# Altium PCB UV_LED_CARD.PcbDoc
Units mil, origin at the board's own origin, x right, y up, seen from the top; angles counter-clockwise.
Board outline 5905.51 x 5905.51 mil, 2 copper layers (Top Layer, Bottom Layer); 41 components, 27 nets, 152 pads, 0 vias.
Unrouted connection lines stored in the file: 1.
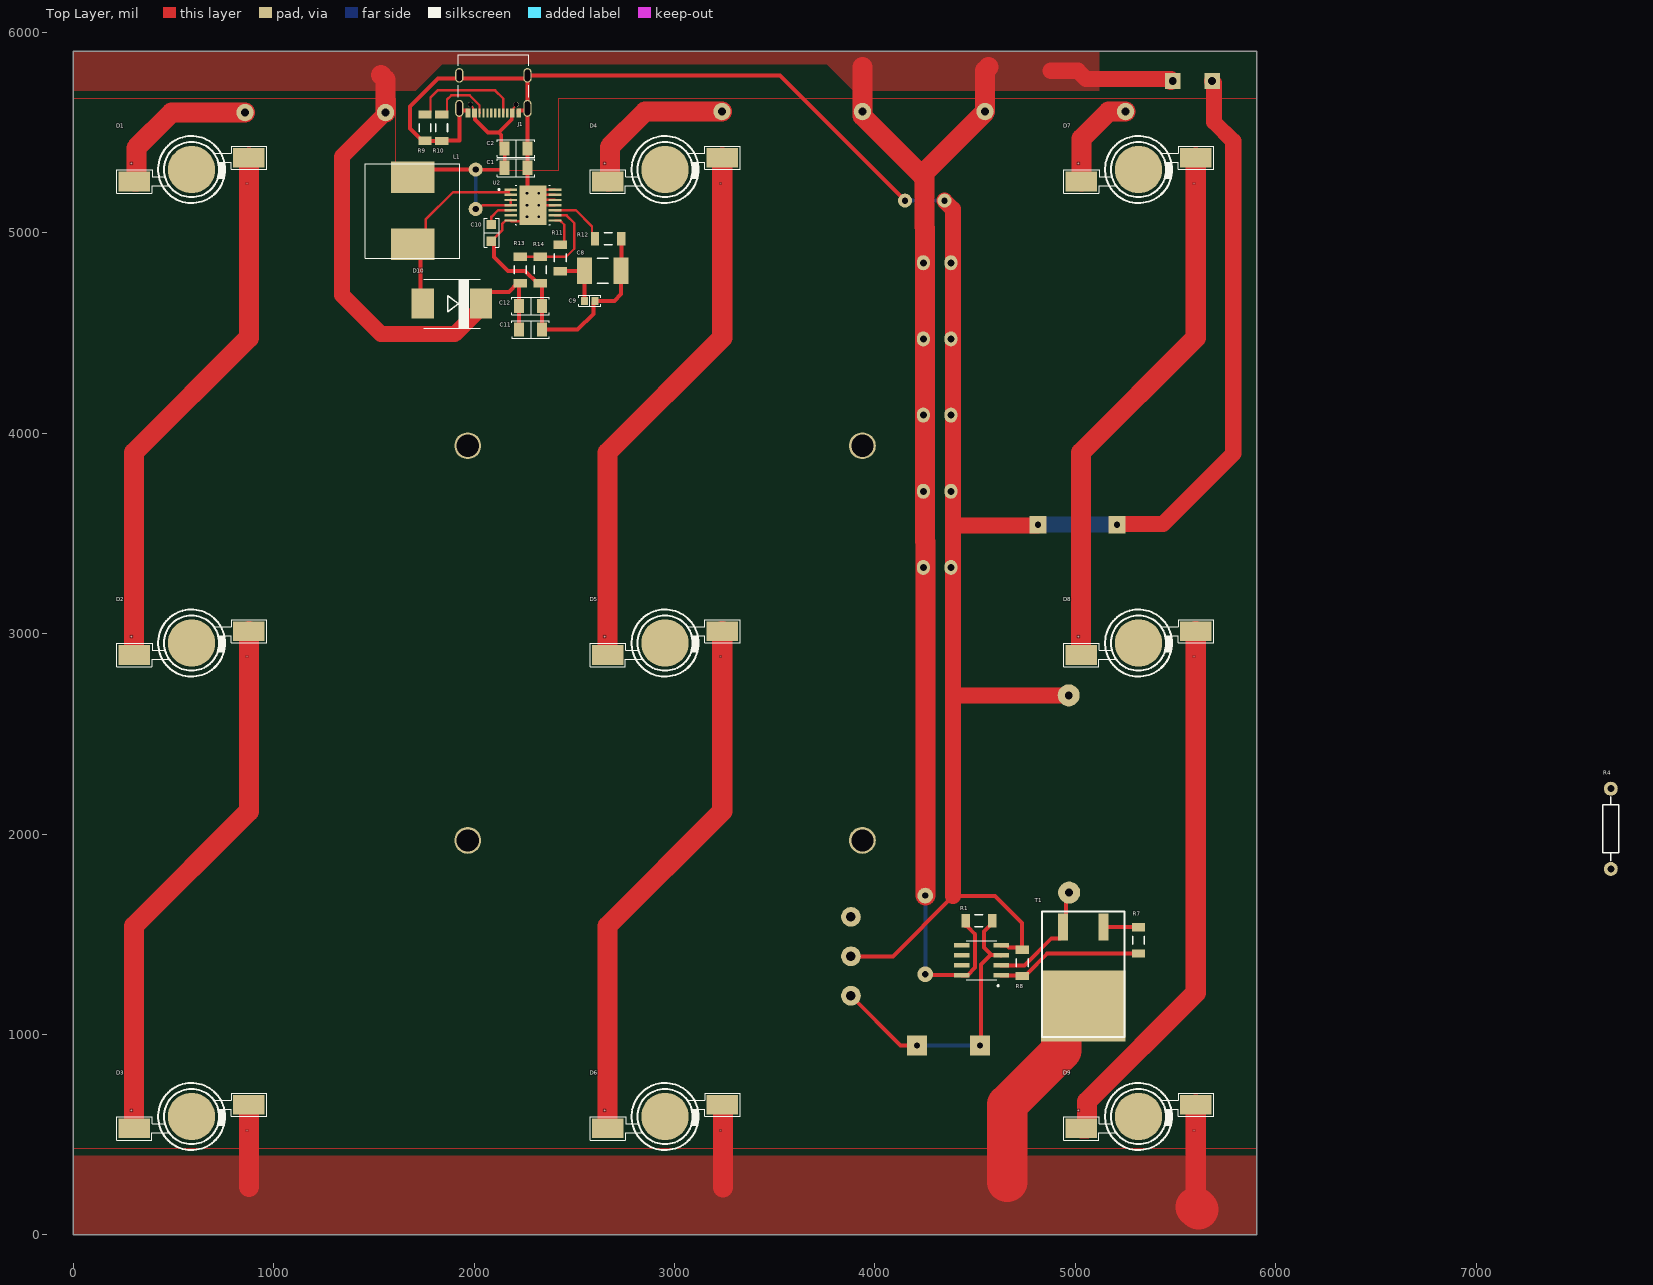
[diagram p0: Top Layer view]
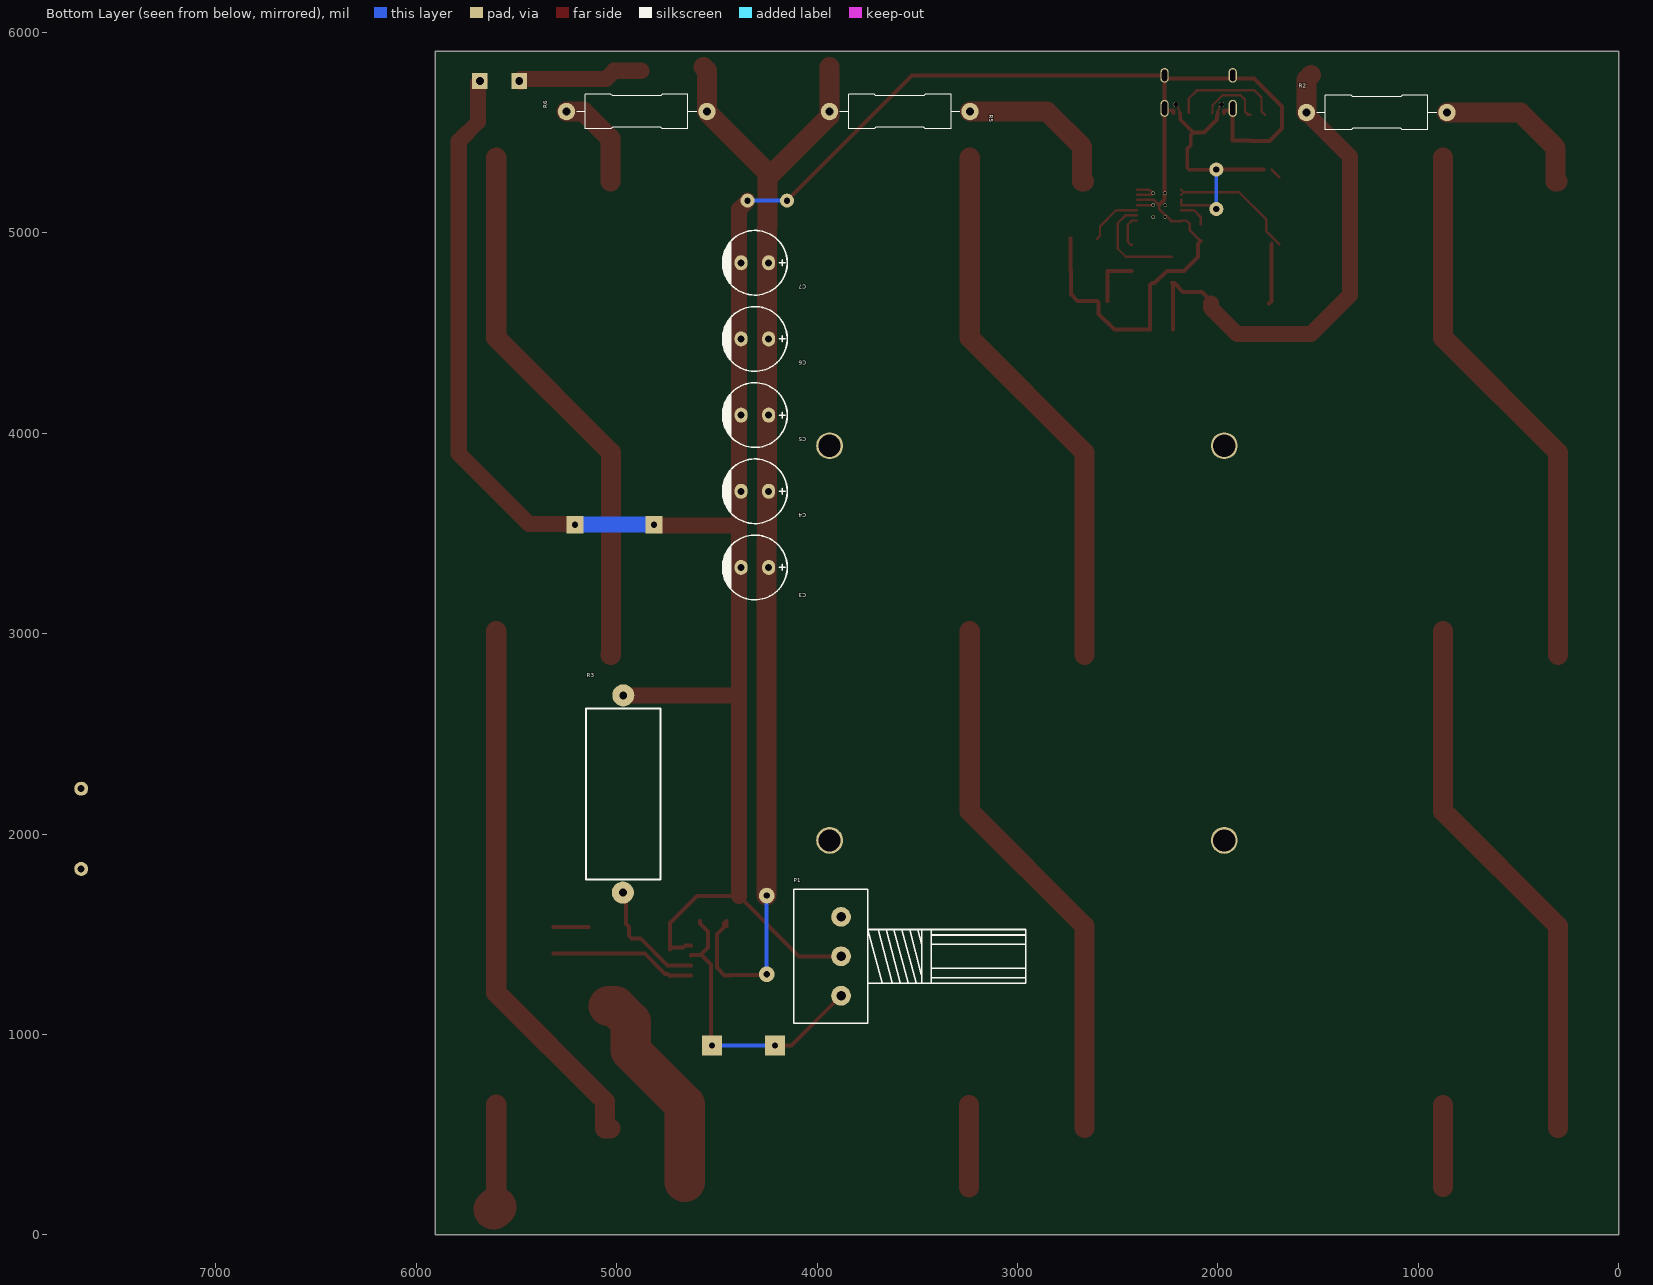
[diagram p1: Bottom Layer view, seen from below]
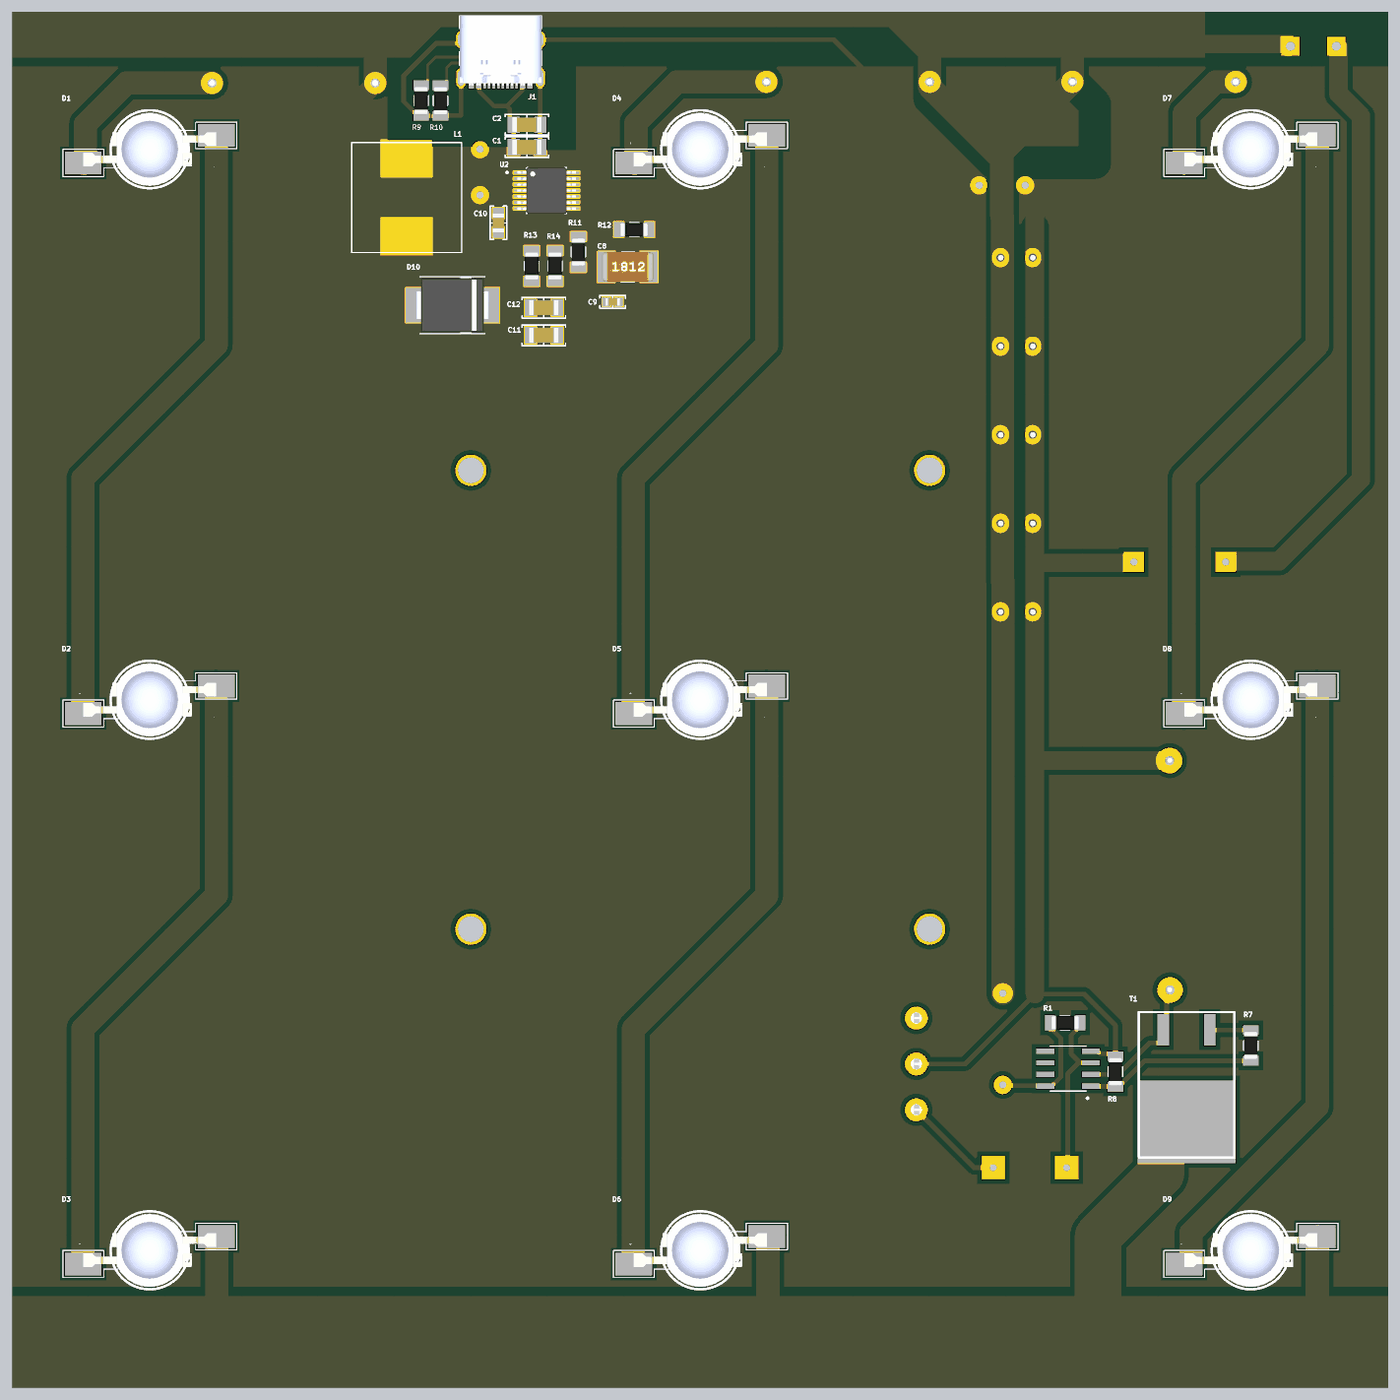
[diagram p2: 3D render of the assembled board from above, using the file's embedded part models]
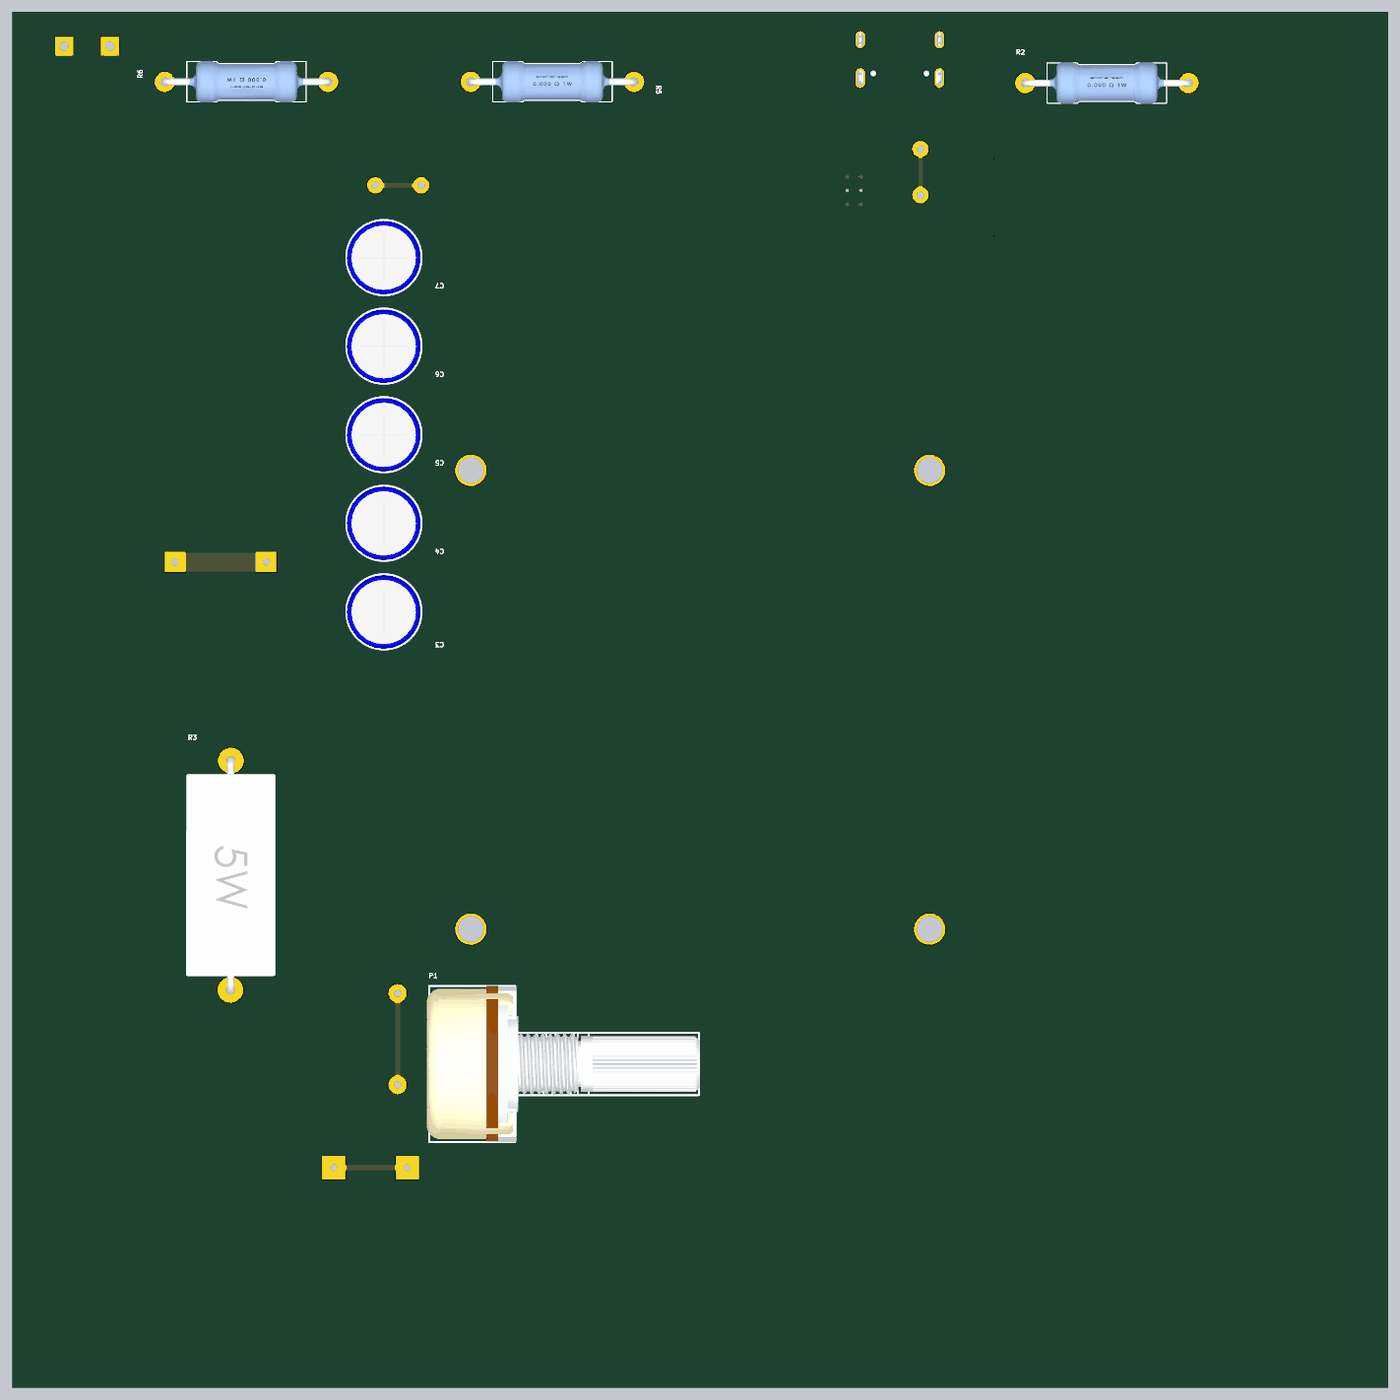
[diagram p3: 3D render of the assembled board from below, using the file's embedded part models]

## Layer stack, top to bottom
Top Solder: solder mask 0.4, Solder Resist, Dk 3.5
Top Layer: signal copper 1.4
Dielectric 1: dielectric 12.6, FR-4, Dk 4.8
Bottom Layer: signal copper 1.4
Bottom Solder: solder mask 0.4, Solder Resist, Dk 3.5

## Board outline
0,0 5905.51,0 5905.51,5905.51 0,5905.51

## Design rules (kind name [scope] priority, off if disabled: settings)
Clearance [All] p1: gap=10 ignorepadtopadclearanceinfootprint=FALSE except(2: Arc-SMDPad Track-SMDPad SMDPad-SMDPad SMDPad-THPad SMDPad-Via SMDPad-Fill SMDPad-Region SMDPad-Text SMDPad-Hole; 20: Arc-Poly Track-Poly SMDPad-Poly THPad-Poly Via-Poly Fill-Poly Poly-Poly Poly-Region Poly-Text Poly-Hole)
PolygonConnect PolygonConnect_1 [(InNet('Thermal Layer'))] p1: connectstyle=Direct reliefconductorwidth=50 reliefentries=4 polygonreliefangle="90 Angle" airgapwidth=10
PolygonConnect [All] p2: connectstyle=Relief reliefconductorwidth=10 reliefentries=4 polygonreliefangle="90 Angle" airgapwidth=10
RoomDefinition Power [InComponentClass('Room Definition2')] p1: confinementstyle=ConfineIn formatcopy=TRUE lockcomponents=FALSE outline 1444.43,4849.09 1444.43,5368.09 1705.63,5368.09 1705.63,5626.5 1788.65,5626.5 1788.65,5629.88 1884.65,5629.88 1884.65,5908.07 2307.8,5908.07 2307.8,5477.24 2315.67,5477.24 2315.67,5257.05 2455.87,5257.05 2455.87,5019.37 2771.34,5019.37 2771.34,4891.97 2788.74,4891.97 2788.74,4728.03 2644.65,4728.03 2644.65,4619.49 2388.03,4619.49 2388.03,4459.29 2175.12,4459.29 2175.12,4511.43 1674.98,4511.43 1674.98,4849.09
RoutingVias [All] p1: holewidth=28 width=50 viastyle="Through Hole" minholewidth=28 minwidth=50 maxholewidth=28 maxwidth=50
SolderMaskExpansion [All] p1: expansion=4 istentingtop=FALSE
SupplyNets "Schematic Supply Nets_8" [InNet('+12V')] p1: voltage=0.000
SupplyNets "Schematic Supply Nets_7" [InNet('+5V')] p2: voltage=0.000
SupplyNets "Schematic Supply Nets_1" [InNet('GND')] p3: voltage=0.000
Width [All] p1: maxlimit=200 minlimit=10 preferedwidth=60 minimp=50.000000 maximp=50.000000 favimp=50.000000
30 further rules are at their usual default settings.

## Classes and differential pairs
component class "Room Definition2": C1 C2 C8 C9 C10 C11 C12 D10 J1 L1 R9 R10 R11 R12 R13 R14 U2
component class "Room Definition1": C1 C2 C8 C9 C10 C11 C12 D10 L1 R11 R12 R13 R14 U2

## Components (designator, comment, footprint, x,y, rotation, side; value= is the part's Value field where it differs from the comment)
C1 "10uF" "CAP 1206/3216" 2209.21,5324.28 r0 top
C2 "100nF" "CAP 1206/3216" 2209.21,5420 r0 top
C3 "470uF" "cap 03" 4310,3330 r180 bottom
C4 "470uF" "cap 03" 4310,3710 r180 bottom
C5 "470uF" "cap 03" 4310,4090 r180 bottom
C6 "470uF" "cap 03" 4310,4470 r180 bottom
C7 "470uF" "cap 03" 4310,4850 r180 bottom
C8 "120nF" 1812_C 2641.77,4810 r0 top
C9 "3.9nF" "CAP 0603/1608" 2576.57,4660 r0 top
C10 "27nF" "CAP 0805/2012" 2086.61,4998.52 r270 top
C11 "47uF" "CAP 1206/3216" 2281.57,4516.54 r0 top
C12 "1uF" "CAP 1206/3216" 2281.57,4634.65 r0 top
D1 "3'Watt" "POWER LED 1WATT" 590.55,5314.96 r0 top
D2 "3'Watt" "POWER LED 1WATT" 590.55,2952.76 r0 top
D3 "3'Watt" "POWER LED 1WATT" 590.55,590.55 r0 top
D4 "3'Watt" "POWER LED 1WATT" 2952.76,5314.96 r0 top
D5 "3'Watt" "POWER LED 1WATT" 2952.76,2952.76 r0 top
D6 "3'Watt" "POWER LED 1WATT" 2952.76,590.55 r0 top
D7 "3'Watt" "POWER LED 1WATT" 5314.96,5314.96 r0 top
D8 "3'Watt" "POWER LED 1WATT" 5314.96,2952.76 r0 top
D9 "3'Watt" "POWER LED 1WATT" 5314.96,590.55 r0 top
D10 "B560C-13-F" SMC 1889.76,4645.67 r180 top
J1 "10155435-00011LF" AMPHENOL_10155435-00011LF 2096.22,5784.88 r180 top
L1 "Inductor" PCBComponent_1 1692.91,5021.59 r0 top
P1 "10k" POT_WH148 3880,1390 r90 bottom
R1 "240k" "RES 1206 (3216X08L)" 4569.8,1566.93 r180 top
R2 "1R" "Axial 1W  7_0mm" 1208,5599 r180 bottom
R3 "27b" "Res 5W" 4960.63,2204.72 r0 bottom
R4 "0" Res-(1/4) 7670,2020 r90 top
R5 "1R" "Axial 1W  7_0mm" 3587,5604 r180 bottom
R6 "1R" "Axial 1W  7_0mm" 4900,5604 r0 bottom
R7 "100R" "RES 1206 (3216X08L)" 5314.96,1520.59 r270 top
R8 "100K" "RES 1206 (3216X08L)" 4734.33,1306.02 r90 top
R9 "5.1k" "RES 1206 (3216X08L)" 1755,5575.16 r270 top
R10 "5.1k" "RES 1206 (3216X08L)" 1838.02,5472.24 r90 top
R11 "768R" "RES 1206 (3216X08L)" 2430,4822.95 r90 top
R12 "60.4k" "RES 1206 (3216X08L)" 2720,4970 r180 top
R13 "86.6K" "RES 1206 (3216X08L)" 2230,4762.95 r90 top
R14 "10K" "RES 1206 (3216X08L)" 2329.69,4865.16 r270 top
T1 "D2PAK NMOS" "D2PAK NMOS" 5249.37,1321.73 r180 top
U2 "TPS55340PWPR" IC_TPS55340PWPR 2293.31,5137.8 r0 top

## Footprints (in the part's own frame and the unit in brackets; to place one, negate y for a bottom-side part, rotate by r counter-clockwise, add the part's x,y. Pads: shape width x height; smd on the part's side, far side on the other; paste and mask are expansions set on the pad)
1812_C [mm] "Surface mount capacitor 1812"
  rect 1.9x3.4 smd: 1(-2.331,0) 2(2.331,0)
  silkscreen extent -0.7,-1.6 0.7,1.6, body extent -2.81,-1.6 2.81,1.6, height 2.54
AMPHENOL_10155435-00011LF [mm]
  rect 0.6x1.15 smd: A1_B12(-3.2,4.745) A4_B9(-2.4,4.745) B1_A12(3.2,4.745) B4_A9(2.4,4.745)
  rect 0.3x1.15 smd: A5(-1.25,4.745) A6(-0.25,4.745) A7(0.25,4.745) A8(1.25,4.745) B5(1.75,4.745) B6(0.75,4.745) B7(-0.75,4.745) B8(-1.75,4.745)
  oval 1.05x2.15 hole 0.65 slot 1.75 at 90 deg: SH1(-4.32,4.18) SH2(4.32,4.18)
  oval 1.05x1.85 hole 0.65 slot 1.45 at 90 deg: SH3(-4.32,0) SH4(4.32,0)
  round 0.65 hole 0.65 unplated: ""(-2.89,3.68) ""(2.89,3.68)
  silkscreen extent -4.47,-2.6 4.47,2.79, body extent -4.47,-2.6 4.47,5, height 3.26
"Axial 1W  7_0mm" [mm] "Designer Abbas Basereh"
  round 2.2 hole 1: 1(8.9,0) 2(-8.9,0)
  silkscreen extent -7.6,-2.2 7.6,2.2, body extent -9.26,-2.24 9.27,2.24, height 5.22
"cap 03" [mil] "diameter: 8'mm"
  oval 65x75 hole 35: 1(68.9,0) 2(-68.9,0)
  silkscreen extent -161,-161 161,161, body extent -159,-159 157,158, height 473
"CAP 0603/1608" [mm] "Chip Capacitor, 2-Leads, Body 1.60x0.80mm, IPC Medium Density"
  rect 0.9x1 smd: 1(-0.675,0) 2(0.675,0)
  silkscreen extent -1.4,-0.7 1.4,0.7, body extent -0.8,-0.41 0.8,0.41, height 0.82
"CAP 0805/2012" [mm] "Chip Capacitor, 2-Leads, Body 2.00x1.20mm, IPC Medium Density"
  rect 1.2x1.2 smd: 1(-1.075,0) 2(1.025,0)
  silkscreen extent -1.86,-0.9 1.82,0.9, body extent -1,-0.64 1,0.64, height 1.26
"CAP 1206/3216" [mm] "Chip Capacitor, 2-Leads, Body 3.25x1.60mm, IPC Medium Density"
  rect 1.3x1.8 smd: 1(-1.45,0) 2(1.45,0)
  silkscreen extent -2.37,-1.12 2.37,1.12, body extent -1.6,-0.81 1.6,0.81, height 1.62
"D2PAK NMOS" [mil]
  rect 49.49x135 smd: 0(110.26,-215) 2(310.24,-215)
  rect 420x355 smd: 1(210,180)
  silkscreen extent 5,-291 415,334
IC_TPS55340PWPR [mm]
  rect 1.6x0.3 smd paste-0.025: 1(-2.8,1.95) 2(-2.8,1.3) 3(-2.8,0.65) 4(-2.8,0) 5(-2.8,-0.65) 6(-2.8,-1.3) 7(-2.8,-1.95) 8(2.8,-1.95) 9(2.8,-1.3) 10(2.8,-0.65) 11(2.8,0) 12(2.8,0.65) 13(2.8,1.3) 14(2.8,1.95)
  rect 3.4x5 smd paste-3 mask+0: 15(0,0)
  round 0.43 hole 0.33 mask+0: 16(-0.75,1.5) 17(0.75,1.5) 18(-0.75,0) 19(0.75,0) 20(-0.75,-1.5) 21(0.75,-1.5)
  silkscreen extent -4.4,-2.5 2.2,2.5, body extent -3.2,-2.5 3.2,2.5, height 1.2
PCBComponent_1 [mil]
  rect 217x157 / inner round 0 / far side round 0 all layers, no hole: 1(0,254) 2(0,-80)
  silkscreen extent -236,-150 236,322
POT_WH148 [mm] "Chip Variable Resistor, 3-Leads, Body 5x5x5mm"
  round 2.5 hole 1.2: 1(-5,0) 2(0,0) 3(5,0)
  silkscreen extent -8.5,-23.4 8.5,6, body extent -8.5,-23.55 8.5,6.25, height 21.5
"POWER LED 1WATT" [mm] "DESIGNER : ABBAS BASEREH"
  round 6 smd: 0(0,0)
  rect 4x2.5 smd: 1(-7.25,-1.5) 2(7.25,1.5)
  silkscreen extent -9.46,-4.25 9.51,4.25, body extent -7.25,-4 7.25,4, height 5.55
"Res 5W" [mil]
  round 110 hole 39.37: 1(6,-487) 2(8,497)
  silkscreen extent -180,-422 193,432, body extent -180,-504 194,512, height 355
"RES 1206 (3216X08L)" [mm] "Chip Resistor, 2-Leads, Body 3.2x1.6mm, IPC High Density _ (0.125 W)"
  rect 1.05x1.7 smd: 1(-0.377,0) 2(2.973,0)
  silkscreen extent 0.8,-0.75 1.8,0.75, body extent -0.23,-0.76 2.82,0.76, height 0.6
Res-(1/4) [mil]
  round 70 hole 35: 1(-194,-1) 2(206,-1)
  silkscreen extent -154,-41 166,39, body extent -204,-48 216,47, height 94
SMC [mm]
  rect 2.8x3.8 smd: A(3.7,0) C(-3.7,0)
  silkscreen extent -3.56,-3.11 3.56,3.11, body extent -3.97,-2.95 3.97,2.95, height 2.5

## Part data
C1 C2 C11 C12: library part Cap_Multi_SMD, "Bipolar ceramic capacitor SMD", Package=Package?, Rating=16VDC, Type=Type?, Validation=Valid, Inflow=inflow?
C3 C4 C5 C6 C7: library part Cap_Electrolit, "Electrolit Capacitor", Package=Dip, Rating=25V, Type=Electrolit, Validation=Valid, Inflow=inflow?
C8: library part Cap_Multi_SMD, "Bipolar ceramic capacitor SMD", Package=Package?, Type=Type?, Validation=Valid, Inflow=inflow?
C9 C10: library part Cap_Multi_SMD, "Bipolar ceramic capacitor SMD", Package=Package?, Rating=50VDC, Type=Type?, Validation=Valid, Inflow=inflow?
D1 D2 D3 D4 D5 D6 D7 D8 D9: library part Semi_LED_Power, "POWER LED SMD", Package=Package?, Rating=Rating?, Type=Type?, Validation=NT, Inflow=UV
D10: "Diode Schottky 60 V 5A Surface Mount SMC", Package="SMC-2 Diodes", Check_prices=https://www.snapeda.com/parts/B560C-13-F/Diodes+Inc./view-part/?ref=eda, MF="Diodes Inc.", MP=B560C-13-F, SnapEDA_Link=https://www.snapeda.com/parts/B560C-13-F/Diodes+Inc./view-part/?ref=snap
J1: Package=None, Availability=Unavailable, MP=10155435-00011LF, Price=None
L1: Value?=6.8uH
P1: library part Res_Pot, "Potentiometer", Package="POT 1/8W", Rating="POT 1/8W", Type="POT 1/8W", Validation="POT 1/8W", Inflow="POT 1/8W"
R1: library part Res_SMD, "Resistor", Package=1206, Rating=1/4W, Type=%5, Validation=Valid, Inflow=inflow?
R2 R5 R6: library part Res_1b_THT_1, "Resistor", Package=Package?, Rating=Rating?, Type=1W, Validation=NT, Inflow="1R 1W"
R3: library part Res_27b_THT_5, "Resistor", Package="Dip 5W", Rating=Rating?, Type=5W, Validation=NT, Inflow="470mR 5W"
R4: library part Res_THT, "Resistor", Package=Dip, Rating=0.25W, Type=10%, Validation=Valid, Inflow=inflow?
R7 R8 R9 R10 R11 R12 R13 R14: library part Res_SMD, "Resistor", Package=1206, Rating=Rating?, Type=10%, Validation=Valid, Inflow=inflow?
T1: "for SQM70060EL or any D2PAK NMOS"
U2: "5-A, 40-V, wide VIN boost, flyback, & SEPIC converter", Package="HTSSOP-14 Texas Instruments", Check_prices=https://www.snapeda.com/parts/TPS55340PWPR/Texas+Instruments/view-part/?ref=eda, Digi-Key_Part_Number=296-39426-2-ND, MF="Texas Instruments", MP=TPS55340PWPR, Purchase-URL=https://pricing.snapeda.com/search/part/TPS55340PWPR/?ref=eda, SnapEDA_Link=https://www.snapeda.com/parts/TPS55340PWPR/Texas+Instruments/view-part/?ref=snap

## Free pads (board coordinates)
  rect 77.56x22.44 smd: 1(4628.94,1295.08) 2(4628.94,1345.08) 3(4628.94,1395.08) 4(4628.94,1445.08) 5(4434.06,1445.08) 6(4434.06,1395.08) 7(4434.06,1345.08) 8(4434.06,1295.08)
  rect 86.61x86.61 hole 31.5: 4(4813.51,3543.32) 4(5207.21,3543.32)
  rect 100x100 hole 30: 5(4525.04,944.88) 6(4210.08,944.88)
  round 133.86 hole 110.24: 7(1968.5,1968.5) 7(1968.5,3937.01) 7(3937.01,1968.5) 7(3937.01,3937.01)
  round 78.74 hole 31.5: 9(4251.1,1300.08) 9(4251.1,1692.91)
  round 70 hole 31.5: 10(2007.87,5118.11) 10(2007.87,5314.96) 10(4150,5160) 10(4346.85,5160)
  rect 78.74x78.74 hole 39.37: ""(5485.39,5756.94) ""(5682.24,5756.94)

## Nets (pads, with @x,y where several pads share a name; then routed paths per layer and width w, separated by ;. In a path a pad name is that pad's centre, name@x,y a point inside that pad or via, vN(x,y) a via of type N, cw(c..) or ccw(c..) an arc to the next point about the centre after c; other vN are vias at no path point)
+5V: C1.1 C2.1 J1. J1.A4_B9 J1.B4_A9 L1.1 pad.10@2007.87,5118.11 pad.10@2007.87,5314.96 U2.3 U2.4 | length 1439.3
  Top Layer w10: J1.@1982.44,5640 1982.44,5635.78 1994.92,5623.3 1994.92,5615.71 2001.73,5608.9 J1.B4_A9 ; J1.A4_B9 2190.71,5608.9 2197.52,5615.71 2197.52,5623.3 2210,5635.78 J1.@2210,5640
  Top Layer w12: L1.1 L1.1@1732.28,5314.96 ; pad.10@2007.87,5118.11 2023.57,5118.11 2043.25,5137.8 U2.4 U2.3
  Top Layer w18: J1.B4_A9 2001.73,5587.24 2004.54,5584.43 2004.54,5564.82 2069.36,5500 2123.08,5500 ; pad.10@2007.87,5314.96 2142.8,5314.96 C1.1 C2.1 2135.54,5436.59 2135.54,5487.54 2123.08,5500 ; J1.A4_B9 2187.9,5595.26 2187.9,5564.82 2123.08,5500
  Top Layer w20: L1.1@1771.65,5314.96 pad.10@2007.87,5314.96
  Bottom Layer w18: pad.10@2007.87,5118.11 pad.10@2007.87,5314.96
+12V: C3.1 C4.1 C5.1 C6.1 C7.1 C11.1 C12.1 D10.C pad.8 pad.9 pad.@5485.39,5756.94 R1.2 R2.2 R5.2 R6.2 R13.1 | length 9066.2
  Top Layer w20: D10.C 2035.43,4659.41 2080.55,4704.53 2173.62,4704.53 2217.2,4748.11 R13.1 2224.49,4742.6 C12.1 C11.1 ; pad.9@4251.1,1300.08 4254.88,1296.3 4432.83,1296.3 pad.8 4461.61,1295.08 4500,1333.46 4500,1500 4459.98,1540.02 4459.98,1559.7 R1.2 ; R1.2@4452.76,1540 R1.2 ; R1.2@4463.43,1543.46 4463.43,1556.26 R1.2
  Top Layer w80: R2.2 1558.39,5597.21 1340,5378.82 1340,4690 1536.02,4493.98 1903.43,4493.98 2035.43,4625.98 D10.C ; 4877,5808 5012,5808 5053.85,5766.15 5476.18,5766.15 pad.@5476.18,5752.8
  Top Layer w100: 1535.43,5787.4 1558.39,5764.44 R2.2 ; 3937.01,5826.77 3937.39,5826.39 3937.39,5582.61 4246.85,5273.15 4246.85,5027.29 4250,5024.14 4250,3460 ; 4232.8,5287.2 R6.2 4549.61,5809.45 4566.93,5826.77 ; pad.9@4251.1,1692.91 4251.1,3460
  Bottom Layer w20: pad.9@4251.1,1300.08 pad.9@4251.1,1692.91
COMP: R11.2 U2.8 | length 166.6
  Top Layer w12: U2.8 2428.95,5061.02 2449.95,5040.02 2449.95,5014.62 2450,5014.57 2450,4954.67 2435.33,4940 R11.2
FB: R13.2 R14.1 U2.9 | length 527.1
  Top Layer w12: R13.2 R14.1 2459.97,4880 2500,4920.03 2500,5048.08 2461.56,5086.52 2403.64,5086.52 U2.9
FREQ: R12.2 U2.10 | length 285.9
  Top Layer w12: U2.10 2507.8,5112.2 2588.28,5031.72 2588.28,4984.67 R12.2
GND: C1.2 C2.2 C3.2 C4.2 C5.2 C6.2 C7.2 C8.2 C9.2 C10.2 C11.2 C12.2 J1.A1_B12 J1.B1_A12 J1.SH1 J1.SH2 J1.SH3 J1.SH4 P1.2 pad.4 pad.10@4150,5160 pad.10@4346.85,5160 pad.@5682.24,5756.94 R3.1 R8.2 R9.2 R10.1 R12.1 R14.2 U2.7 U2.11 U2.12 U2.13 U2.14 U2.15 U2.16 U2.17 U2.18 U2.19 U2.20 U2.21 | length 15155.4
  Top Layer w12: C10.2 2140,5011.56 2140,5043.35 2157.67,5061.02 U2.7 ; U2.7@2186.42,5057.99 2232.38,5057.99 2293.31,5118.92 U2.15 ; U2.15@2293.31,5121.95 U2.15 ; U2.19 U2.11 ; U2.12 2318.9,5163.39 U2.15 ; U2.13 2403.45,5189.07 2331.95,5189.07 2324.17,5196.85 2341.79,5214.47 2403.45,5214.47 U2.14
  Top Layer w20: R10.1 1837.67,5457.76 1755.35,5457.76 R9.2 1742.2,5458.11 1680,5520.31 1680,5630 1819.5,5769.5 1916.28,5769.5 J1.SH4@1926.14,5779.36 ; R10.1@1838.02,5460 1926.14,5460 J1.SH2@1926.14,5619.05 ; J1.SH2 J1.SH2@1926.14,5619.05 ; J1.SH4 J1.SH4@1926.14,5779.36 ; J1.B1_A12 1970.24,5607.38 1968.43,5609.19 1936,5609.19 J1.SH2@1926.14,5619.05 ; C10.2 2100.24,4944.56 2100.24,4879.76 2170,4810 2255.01,4810 2316.9,4748.11 R14.2 2338.66,4739.14 C12.2 C11.2 2516.54,4516.54 2595.43,4595.43 2595.43,4652.28 C9.2 2700,4660 2733.54,4693.54 C8.2 2734.84,4811.3 R12.1 ; J1.A1_B12 2222.2,5607.38 2224.02,5609.19 2256.44,5609.19 J1.SH1@2266.3,5619.05 ; J1.SH3@2266.3,5765 J1.SH1 ; J1.SH1@2270,5616.61 J1.SH1 ; U2.15 2266.3,5164.8 C1.2 C2.2 J1.SH1@2266.3,5619.05 ; P1.2 4088.9,1390 4388.9,1690 4600,1690 4734.08,1555.92 4734.08,1433.74 4734.33,1433.49 R8.2 ; pad.10@4130,5180 3525.12,5784.88 J1.SH3 2266.3,5779.23 2256.44,5769.37 1936,5769.37 1926.14,5779.23 J1.SH4@1926.14,5779.36 ; pad.4@4628.94,1445.08 4656.5,1445.08 4667.83,1433.74 4723.66,1433.74 R8.2@4728.87,1428.53 ; J1.SH1@2266.3,5619.05 J1.SH1
  Top Layer w80: pad.10@4346.85,5160 4388.9,5117.95 4388.9,4980 4388.9,3840 4388.9,3540 ; 4388.9,1690 4388.9,2690 ; pad.4@4813.51,3543.32 4810.21,3540.01 4550.01,3540.01 4388.9,3540 ; R3.1@4960.89,2685.98 R3.1 4390.62,2691.72 4388.9,2690 ; pad.4@5207.21,3543.32 5210.52,3546.62 5436.39,3546.62 5787.4,3897.64 5787.4,5456.35 5691.46,5552.29 5691.46,5747.72 pad.@5682.24,5756.94 ; 4388.9,2690 4388.9,3540
  Bottom Layer w20: pad.10@4150,5160 pad.10@4346.85,5160
  Bottom Layer w80: pad.4@4813.51,3543.32 pad.4@5207.21,3543.32
NetC8_1: C8.1 C9.1 R11.1 | length 270.8
  Top Layer w20: R11.1 2548.11,4808.11 C8.1 C9.1
NetD1_1: D1.1 R2.1 | length 792.2
  Top Layer w100: D1.1 314.17,5255.91 314.96,5256.69 314.96,5423.26 490.7,5599 R2.1
NetD1_2: D1.2 D2.1 | length 2716.6
  Top Layer w100: D2.1@303.59,2894.49 303.59,3903 875.98,4475.39 D1.2
NetD2_2: D2.2 D3.1 | length 2716.6
  Top Layer w100: D3.1@303.59,532.28 303.59,1540.8 875.98,2113.19 D2.2
NetD3_2: D3.2 D6.2 D9.2 T1.1 | length 2407
  Top Layer w100: 877.97,238.41 D3.2@877.97,648.82 ; 3242.94,236.22 D6.2@3242.94,648.82 ; 5600.39,139.76 D9.2
  Top Layer w200: 4660,263.26 4660,650 4929.37,919.37 4929.37,1064.23 5006.87,1141.73 T1.1 ; 5600.39,139.76 5614.17,125.98
NetD4_1: D4.1 R5.1 | length 814
  Top Layer w100: D4.1 2676.38,5255.91 2677.17,5256.69 2677.17,5428.26 2852.9,5604 R5.1
NetD4_2: D4.2 D5.1 | length 2716.6
  Top Layer w100: D5.1@2665.8,2894.49 2665.8,3903 3238.19,4475.39 D4.2
NetD5_2: D5.2 D6.1 | length 2716.6
  Top Layer w100: D6.1@2665.8,532.28 2665.8,1540.8 3238.19,2113.19 D5.2
NetD7_1: D7.1 R6.1 | length 489.6
  Top Layer w100: D7.1 5030,5256.38 5030,5469 5165,5604 R6.1
NetD7_2: D7.2 D8.1 | length 2718.5
  Top Layer w100: D8.1 5028.79,2893.7 5028,2894.49 5028,3903 5600.39,4475.39 D7.2
NetD8_2: D8.2 D9.1 | length 2733.1
  Top Layer w100: D9.1 5057.48,531.5 5058.27,532.28 5058.27,665.5 5600.39,1207.63 D8.2
NetJ1_A5: J1.A5 R9.1 | length 559.2
  Top Layer w12: R9.1@1765.89,5588.1 1782.46,5604.67 1782.46,5674.58 1817.88,5710 2105,5710 2145.43,5669.57 J1.A5
NetJ1_B5: J1.B5 R10.2 | length 322.2
  Top Layer w12: R10.2 1850.33,5589.29 1865,5603.96 1865,5663.91 1886.09,5685 1978.16,5685 2027.23,5635.94 2027.23,5598.17 J1.B5
NetP1_1: P1.1 pad.3 pad.5@4525.04,944.88 pad.6@4210.08,944.88 R1.1 | length 1485.1
  Top Layer w20: P1.1 4128.27,944.88 pad.6@4210.08,944.88 ; pad.5@4530,933.25 4530,1348.74 4577.56,1396.3 4581.1,1396.3 ; R1.1 4584.65,1554.13 4544.33,1513.82 4544.33,1433.07 4581.1,1396.3 ; pad.3 4627.72,1396.3 4581.1,1396.3
  Bottom Layer w20: pad.6@4210.08,944.88 pad.5@4525.04,944.88
NetR7_2: pad.1 R7.2 R8.1 | length 734.2
  Top Layer w20: pad.1 4630.16,1293.86 4731.65,1293.86 R8.1 4745,1301.85 4757.8,1301.85 4859.49,1403.54 R7.2
OPAMP_N: pad.2 R3.2 T1.2 | length 597.4
  Top Layer w20: pad.2 4745.08,1345.08 4880,1480 4924.39,1480 4939.13,1494.74 T1.2 4953.88,1551.48 4953.88,1692.97 R3.2
OPAMP_OUT: R7.1 T1.0 | length 176.4
  Top Layer w20: T1.0 5140.41,1535.43 R7.1
SS: C10.1 U2.5 | length 148.2
  Top Layer w12: C10.1 2086.61,5078.74 2119.98,5112.11 2182.98,5112.11 U2.5
SW: D10.A L1.2 U2.1 U2.2 | length 965.7
  Top Layer w12: L1.2 1757.92,5006.59 1757.92,5065 1894.68,5201.77 2170.28,5201.77 ; L1.2@1732.28,4941.59 L1.2@1732.28,4950.96 ; U2.2 2170.28,5201.77 ; U2.1 2170.28,5201.77
  Top Layer w20: L1.2@1732.28,4941.59 1732.28,4657.48 D10.A
SYNC: U2.6
"Thermal Layer": R4.1 R4.2
pads on no net: D1.0 D2.0 D3.0 D4.0 D5.0 D6.0 D7.0 D8.0 D9.0 J1.A6 J1.A7 J1.A8 J1.B6 J1.B7 J1.B8 P1.3

## Polygon pours and split planes (outlines as drawn)
+12V on Top Layer "NONET_L-01_P-001" (solid, pour order 0): 0,5905.51 0,5708.66 1708.66,5708.66 1840,5840 3760,5840 3891.34,5708.66 5118.11,5708.66 5118.11,5905.51
"Thermal Layer" on Top Layer "NONET_L-01_P-001" (solid, shelved, pour order 2): 2420,5669.29 2420,5310 1610,5310 1610,5669.29 0,5669.29 0,433.07 5905.51,433.07 5905.51,5669.29
NetD3_2 on Top Layer "NONET_L-01_P-001" (solid, pour order 1): 0,393.7 0,0 5905.51,0 5905.51,393.7

## Silkscreen, mask and mechanical layers (free items; w line width, h text height)
Top Overlay:
  circle w7.87: c4614.33,1243.07 r3.94
  lines w5: 4454.72,1273.62 4608.27,1273.62 ; 4454.72,1466.54 4608.27,1466.54
Mechanical 13:
  lines w0: 4409.5,1285.08 4409.5,1305.08 4452.5,1305.08 4452.5,1285.08 4409.5,1285.08 ; 4409.5,1335.08 4409.5,1355.08 4452.5,1355.08 4452.5,1335.08 4409.5,1335.08 ; 4409.5,1385.08 4409.5,1405.08 4452.5,1405.08 4452.5,1385.08 4409.5,1385.08 ; 4409.5,1435.08 4409.5,1455.08 4452.5,1455.08 4452.5,1435.08 4409.5,1435.08 ; 4610.5,1285.08 4610.5,1305.08 4653.5,1305.08 4653.5,1285.08 4610.5,1285.08 ; 4610.5,1335.08 4610.5,1355.08 4653.5,1355.08 4653.5,1335.08 4610.5,1335.08 ; 4610.5,1385.08 4610.5,1405.08 4653.5,1405.08 4653.5,1385.08 4610.5,1385.08 ; 4610.5,1435.08 4610.5,1455.08 4653.5,1455.08 4653.5,1435.08 4610.5,1435.08
  lines w5: 4454.72,1273.62 4454.72,1466.54 4608.27,1466.54 4608.27,1273.62 4454.72,1273.62
Mechanical 15:
  lines w1.97: 4385.43,1261.81 4677.56,1261.81 4677.56,1478.35 4385.43,1478.35 4385.43,1261.81

## Text inside footprints (layer, text, board x,y; h text height)
D1: Top Overlay "+" at 285.43,5334.65 h20; Top Overlay "-" at 866.14,5236.22 h20
D2: Top Overlay "+" at 285.43,2972.44 h20; Top Overlay "-" at 866.14,2874.02 h20
D3: Top Overlay "-" at 866.14,511.81 h20; Top Overlay "+" at 285.43,610.24 h20
D4: Top Overlay "+" at 2647.64,5334.65 h20; Top Overlay "-" at 3228.35,5236.22 h20
D5: Top Overlay "+" at 2647.64,2972.44 h20; Top Overlay "-" at 3228.35,2874.02 h20
D6: Top Overlay "+" at 2647.64,610.24 h20; Top Overlay "-" at 3228.35,511.81 h20
D7: Top Overlay "+" at 5009.84,5334.65 h20; Top Overlay "-" at 5590.55,5236.22 h20
D8: Top Overlay "+" at 5009.84,2972.44 h20; Top Overlay "-" at 5590.55,2874.02 h20
D9: Top Overlay "+" at 5009.84,610.24 h20; Top Overlay "-" at 5590.55,511.81 h20